# EAGLE board 4x4-soundboard (EAGLE 8.1.0)
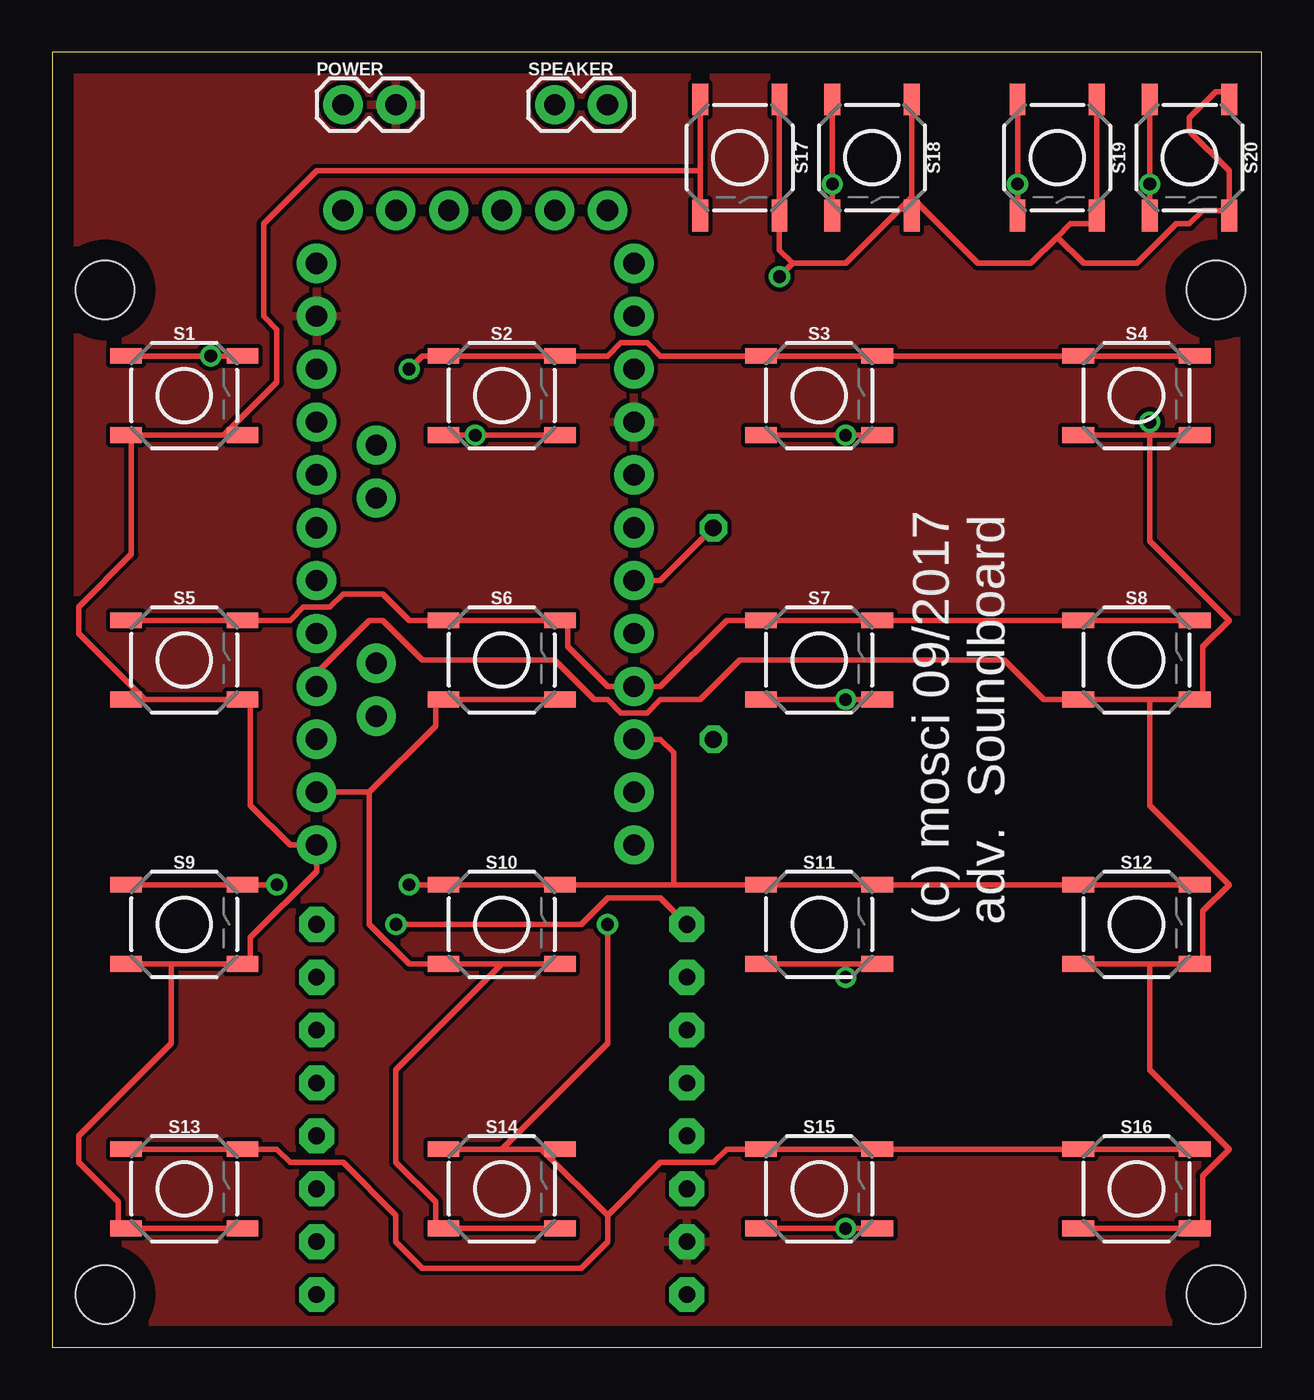
[diagram p0: board, top side]
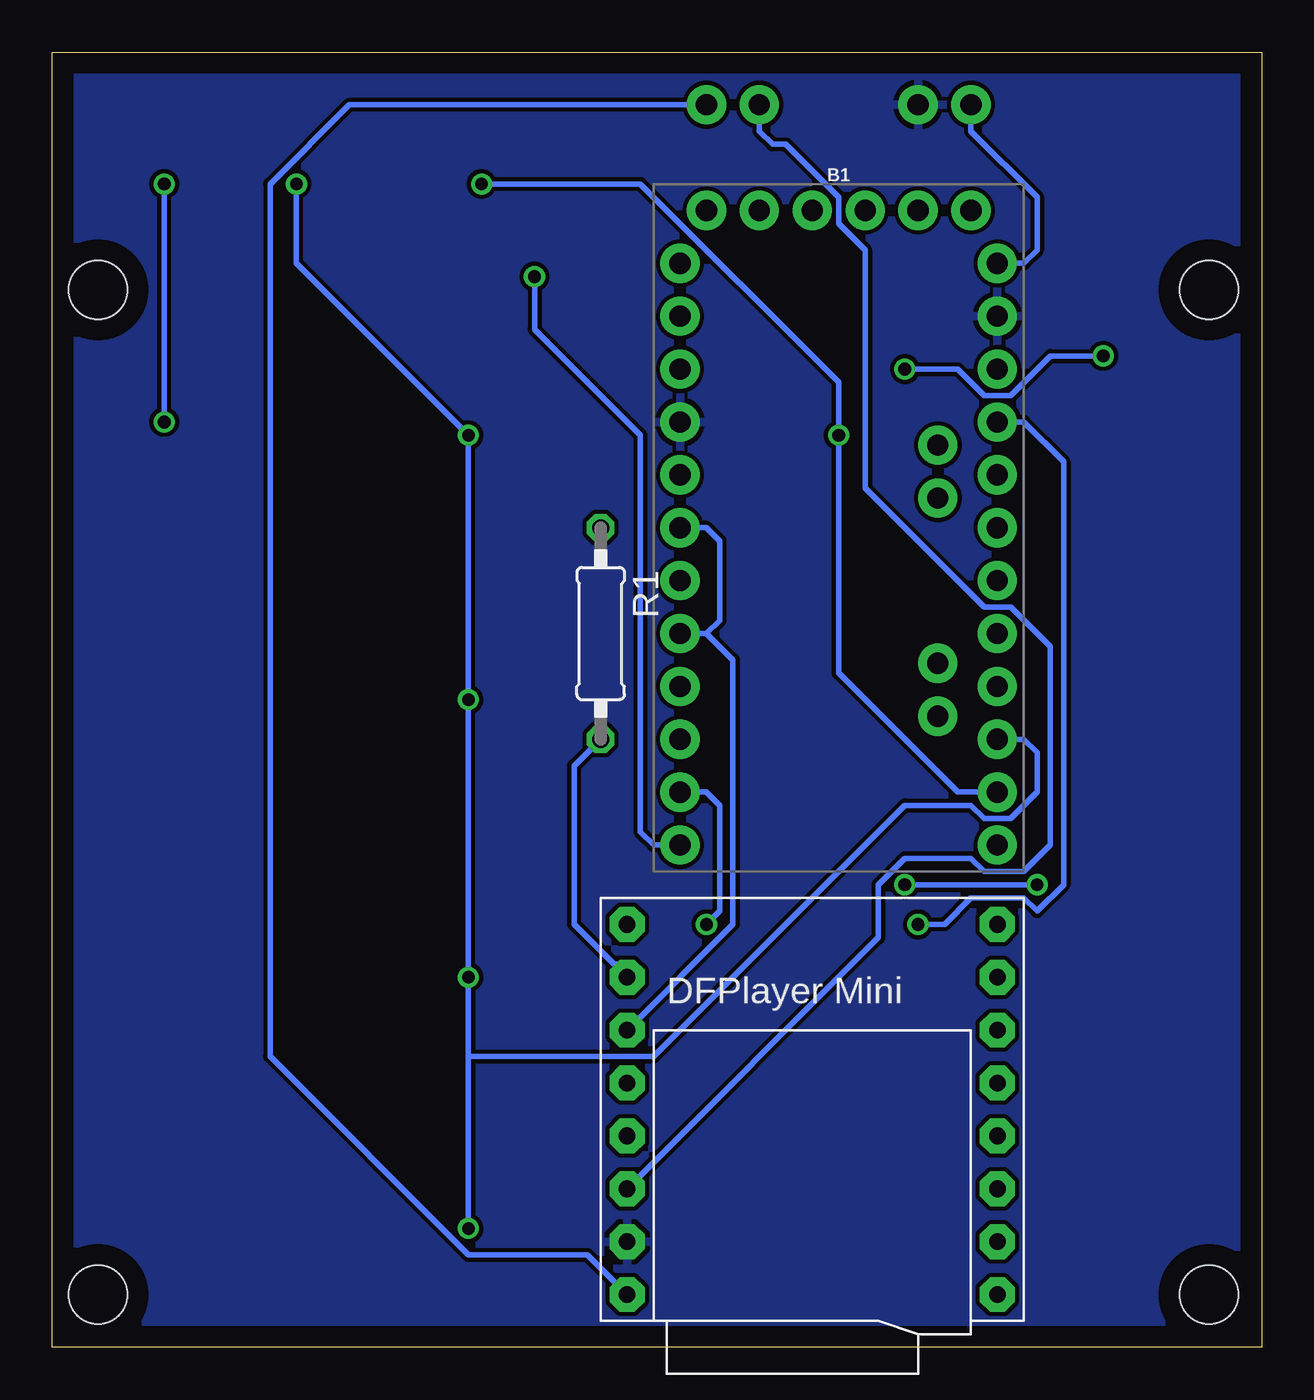
[diagram p1: board, bottom side, seen from below]

Size 58.09 x 62.22 mm. Coordinates in mm from the lower left corner, seen from the top.
Outline: 0,0 58.09,0 58.09,62.22 0,62.22 0,0
Copper layers (1*16): Top 0.035mm / dielectric 1.5mm / Bottom 0.035mm
Design rules "default": minimum track width 10mil, minimum drill 24mil, track to track 8mil, track to pad 8mil, pad to pad 8mil, via to via 8mil, smd to smd 8mil, copper to edge 40mil, drill to drill 8mil, minimum pad ring 10mil, minimum via ring 8mil, stop-mask expansion 4mil, vias tented up to drill 0mil, thermal gap 10mil
Holes 2.8 mm at 2.54,50.8 55.88,50.8 2.54,2.54 55.88,2.54

## Footprints (pad centres in the part's own frame; a part is rotated, then mirrored left to right if it is on the bottom)
ARDUINO_PRO_MINI = drill 1.016 pad 1.88: 1 -7.62,12.7; 2 -7.62,10.16; 3 -7.62,7.62; 4 -7.62,5.08; 5 -7.62,2.54; 6 -7.62,0; 7 -7.62,-2.54; 8 -7.62,-5.08; 9 -7.62,-7.62; 10 -7.62,-10.16; 11 -7.62,-12.7; 12 -7.62,-15.24; 13 7.62,-15.24; 14 7.62,-12.7; 15 7.62,-10.16; 16 7.62,-7.62; 17 7.62,-5.08; 18 7.62,-2.54; 19 7.62,0; 20 7.62,2.54; 21 7.62,5.08; 22 7.62,7.62; 23 7.62,10.16; 24 7.62,12.7; A4 4.763,1.429; A5 4.763,3.969; A6 4.763,-9.049; A7 4.763,-6.509; BLK -6.35,15.24; GND -3.81,15.24; GRN 6.35,15.24; RXI 1.27,15.24; TXO 3.81,15.24; VCC -1.27,15.24
1X02 = drill 1.016 pad 1.88: 1 0,0; 2 2.54,0
0207/10 = drill 0.813 octagon: 1 -5.08,0; 2 5.08,0
TACTILE_SWITCH_SMD_5.2MM = smd 1.524 x 0.762: 1 -2.794,1.905; 2 2.794,1.905; 3 -2.794,-1.905; 4 2.794,-1.905
DFPLAYER = drill 0.8 pad 1.676 octagon: ADKEY1 8.89,-1.27; ADKEY2 8.89,1.27; BUSY 8.89,8.89; DAC_L -8.89,-1.27; DAC_R -8.89,1.27; GND_1 -8.89,-6.35; GND_2 8.89,-6.35; IO1 8.89,-8.89; IO2 8.89,-3.81; RX -8.89,6.35; SPK1 -8.89,-3.81; SPK2 -8.89,-8.89; TX -8.89,3.81; USB+ 8.89,3.81; USB- 8.89,6.35; VCC -8.89,8.89

## Placement (x,y rotation side)
B1  ARDUINO_PRO_MINI  [ARDUINO_PRO_MINI]  20.32,39.37 0 bottom
POWER  [1X02]  13.97,59.69 0 top
R1  1K  [0207/10]  31.75,34.29 270 bottom
S1  [TACTILE_SWITCH_SMD_5.2MM]  6.35,45.72 0 top
S2  [TACTILE_SWITCH_SMD_5.2MM]  21.59,45.72 0 top
S3  [TACTILE_SWITCH_SMD_5.2MM]  36.83,45.72 0 top
S4  [TACTILE_SWITCH_SMD_5.2MM]  52.07,45.72 0 top
S5  [TACTILE_SWITCH_SMD_5.2MM]  6.35,33.02 0 top
S6  [TACTILE_SWITCH_SMD_5.2MM]  21.59,33.02 0 top
S7  [TACTILE_SWITCH_SMD_5.2MM]  36.83,33.02 0 top
S8  [TACTILE_SWITCH_SMD_5.2MM]  52.07,33.02 0 top
S9  [TACTILE_SWITCH_SMD_5.2MM]  6.35,20.32 0 top
S10  [TACTILE_SWITCH_SMD_5.2MM]  21.59,20.32 0 top
S11  [TACTILE_SWITCH_SMD_5.2MM]  36.83,20.32 0 top
S12  [TACTILE_SWITCH_SMD_5.2MM]  52.07,20.32 0 top
S13  [TACTILE_SWITCH_SMD_5.2MM]  6.35,7.62 0 top
S14  [TACTILE_SWITCH_SMD_5.2MM]  21.59,7.62 0 top
S15  [TACTILE_SWITCH_SMD_5.2MM]  36.83,7.62 0 top
S16  [TACTILE_SWITCH_SMD_5.2MM]  52.07,7.62 0 top
S17  [TACTILE_SWITCH_SMD_5.2MM]  33.02,57.15 270 top
S18  [TACTILE_SWITCH_SMD_5.2MM]  39.37,57.15 270 top
S19  [TACTILE_SWITCH_SMD_5.2MM]  48.26,57.15 270 top
S20  [TACTILE_SWITCH_SMD_5.2MM]  54.61,57.15 270 top
SPEAKER  [1X02]  24.13,59.69 0 top
U$1  DFPLAYER  [DFPLAYER]  21.59,11.43 0 bottom

## Library data of the parts
B1 = SparkFun-Boards
POWER SPEAKER = SparkFun-Connectors
R1 = resistor
S1-S20 = SparkFun-Switches; PROD_ID: SWCH-08247; SF_SKU: COM-08720
U$1 = DFPlayer_v1

## Nets
5V: B1.21 U$1.VCC
COL1: B1.13 S1.3 S1.4 S5.3 S5.4 S9.3 S9.4 S13.3 S13.4 S17.3 S17.4
COL2: B1.14 S2.3 S2.4 S6.3 S6.4 S10.3 S10.4 S14.3 S14.4 S18.3 S18.4
COL3: B1.15 S3.3 S3.4 S7.3 S7.4 S11.3 S11.4 S15.3 S15.4 S19.3 S19.4
COL4: B1.16 S4.3 S4.4 S8.3 S8.4 S12.3 S12.4 S16.3 S16.4 S20.3 S20.4
GND: B1.4 B1.23 POWER.2 U$1.GND_1
N$1: B1.7 R1.1
ROW1: S1.1 S1.2 S2.1 S2.2 S3.1 S3.2 S4.1 S4.2
ROW2: B1.9 S5.1 S5.2 S6.1 S6.2 S7.1 S7.2 S8.1 S8.2
ROW3: B1.10 S9.1 S9.2 S10.1 S10.2 S11.1 S11.2 S12.1 S12.2
ROW4: B1.11 S13.1 S13.2 S14.1 S14.2 S15.1 S15.2 S16.1 S16.2
ROW5: B1.12 S17.1 S17.2 S18.1 S18.2 S19.1 S19.2 S20.1 S20.2
SPK+: SPEAKER.1 U$1.SPK1
SPK-: SPEAKER.2 U$1.SPK2
SRX: B1.6 B1.8 U$1.TX
STX: R1.2 U$1.RX
VIN: B1.24 POWER.1

## Tracks (layer width: path | path; a pad name or v marks a point on that pad's centre or on a via)
5V  (via drill 0.61)
  Top 0.254: U$1.VCC 29.21,21.59 26.67,21.59 25.4,20.32 v16.51,20.32
  Bottom 0.254: v16.51,20.32 15.24,20.32 13.97,21.59 11.43,21.59 10.79,20.95 9.53,22.22 9.53,42.55 11.43,44.45 B1.21
COL1
  Top 0.254: S13.4 S13.3 3.17,5.71 3.17,6.98 1.27,8.89 1.27,10.16 5.71,14.61 5.71,18.41 | 5.71,18.41 S9.4 9.53,18.41 9.53,19.68 12.7,22.86 B1.13 11.43,24.13 9.53,26.04 9.53,31.11 S5.4 4.45,31.11 | 5.71,18.41 S9.3 | S17.3 31.11,56.52 | 31.11,56.52 S17.4 | S1.4 8.26,43.82 | 8.26,43.82 3.81,43.82 | 4.45,31.11 S5.3 | 3.81,43.82 3.81,38.1 1.27,35.56 1.27,34.29 4.45,31.11 | 3.81,43.82 S1.3 | 31.11,56.52 12.7,56.52 10.16,53.98 10.16,49.53 10.79,48.9 10.79,46.36 8.26,43.82
COL2  (via drill 0.61)
  Top 0.254: S14.4 S14.3 18.41,5.71 18.41,6.98 16.51,8.89 16.51,13.33 21.59,18.41 | S10.4 21.59,18.41 | 21.59,18.41 S10.3 17.14,18.41 15.24,20.32 15.24,26.67 | S18.3 v37.47,55.88 S18.4 | S2.4 v20.32,43.82 S2.3 | S6.4 S6.3 18.41,31.11 18.41,29.84 15.24,26.67 | B1.14 15.24,26.67
  Bottom 0.254: B1.14 14.61,26.67 20.32,32.38 v20.32,43.82 20.32,46.36 29.84,55.88 v37.47,55.88
COL3  (via drill 0.61)
  Top 0.254: S19.3 v46.35,55.88 S19.4 | S3.4 v38.1,43.82 S3.3 | S7.4 v38.1,31.11 S7.3 | S15.4 v38.1,5.71 S15.3 | S11.4 38.1,18.41 | 38.1,18.41 S11.3 | 38.1,18.41 v38.1,17.78
  Bottom 0.254: 38.1,13.97 v38.1,17.78 v38.1,31.11 v38.1,43.82 46.35,52.07 v46.35,55.88 | 38.1,13.97 v38.1,5.71 | B1.15 11.43,29.21 10.79,28.57 10.79,26.67 12.06,25.4 13.34,25.4 13.97,26.04 17.14,26.04 29.21,13.97 38.1,13.97
COL4  (via drill 0.61)
  Top 0.254: S16.3 S16.4 55.24,5.71 55.24,8.26 56.52,9.53 52.7,13.33 52.7,18.41 | 52.7,18.41 S12.4 55.24,18.41 55.24,20.95 56.52,22.22 52.7,26.04 52.7,31.11 | 52.7,18.41 S12.3 | S20.3 v52.7,55.88 S20.4 | 52.7,31.11 S8.4 55.24,31.11 55.24,33.66 56.52,34.93 52.7,38.74 52.7,43.82 | 52.7,31.11 S8.3 47.62,31.11 45.72,33.02 33.02,33.02 31.11,31.11 29.21,31.11 28.57,30.48 27.3,30.48 26.67,31.11 26.04,31.11 24.13,33.02 17.78,33.02 15.88,34.93 15.24,34.93 12.7,32.38 B1.16 | S4.4 52.7,43.82 | 52.7,43.82 S4.3 | 52.7,43.82 v52.7,44.45
  Bottom 0.254: v52.7,44.45 v52.7,55.88
GND
  pour Top: -7.62,90.17 66.04,90.17 66.04,-11.43 -7.62,-11.43
  pour Bottom: -3.81,85.09 62.23,85.09 62.23,-5.08 -3.81,-5.08
N$1
  Top 0.254: R1.1 29.21,36.83 B1.7
ROW1  (via drill 0.61)
  Top 0.254: S4.2 S4.1 S3.2 S3.1 29.21,47.62 28.57,48.26 27.3,48.26 26.67,47.62 S2.2 S2.1 17.78,47.62 v17.14,46.99 | S1.2 v7.62,47.62 S1.1
  Bottom 0.254: v7.62,47.62 10.16,47.62 12.06,45.72 13.34,45.72 14.61,46.99 v17.14,46.99
ROW2
  Top 0.254: S5.1 S5.2 11.43,34.93 12.06,35.56 13.34,35.56 13.97,36.2 15.88,36.2 17.14,34.93 S6.1 S6.2 24.77,34.93 24.77,33.66 26.67,31.75 B1.9 29.21,31.75 32.38,34.93 S7.1 S7.2 S8.1 S8.2
ROW3  (via drill 0.61)
  Top 0.254: S12.2 S12.1 S11.2 S11.1 29.84,22.22 | S9.1 S9.2 v10.79,22.22 | v17.14,22.22 S10.1 S10.2 29.84,22.22 | B1.10 29.21,29.21 29.84,28.57 29.84,22.22
  Bottom 0.254: v17.14,22.22 v10.79,22.22
ROW4  (via drill 0.61)
  Top 0.254: S16.2 S16.1 S15.2 S15.1 32.38,9.53 31.75,8.89 29.21,8.89 26.67,6.35 | S13.1 S13.2 10.79,9.53 11.43,8.89 13.97,8.89 16.51,6.35 16.51,5.08 17.78,3.81 25.4,3.81 26.67,5.08 26.67,6.35 | S14.2 23.5,9.53 | 23.5,9.53 21.59,9.53 | 21.59,9.53 S14.1 | 23.5,9.53 26.67,6.35 | v26.67,20.32 26.67,14.61 21.59,9.53
  Bottom 0.254: B1.11 26.67,26.67 26.04,26.04 26.04,20.95 v26.67,20.32
ROW5  (via drill 0.61)
  Top 0.254: 56.52,54.61 56.52,56.52 54.61,58.42 54.61,59.05 55.88,60.33 56.52,60.33 S20.1 | S19.1 S19.2 50.16,53.98 48.9,53.98 48.26,53.34 | S17.1 S17.2 34.92,52.71 35.56,52.07 | S18.1 41.27,55.25 | 41.27,55.25 S18.2 | 35.56,52.07 38.1,52.07 41.27,55.25 | 48.26,53.34 46.99,52.07 44.45,52.07 41.27,55.25 | 56.52,54.61 55.24,54.61 54.61,53.98 53.98,53.98 52.07,52.07 49.53,52.07 48.26,53.34 | 56.52,54.61 S20.2 | 35.56,52.07 v34.92,51.44
  Bottom 0.254: B1.12 29.21,24.13 29.84,24.77 29.84,43.82 34.92,48.9 v34.92,51.44
SPK+
  Bottom 0.254: U$1.SPK1 18.41,19.68 18.41,22.22 17.14,23.5 13.97,23.5 13.34,22.86 11.43,22.86 10.16,24.13 10.16,33.66 12.06,35.56 13.34,35.56 19.05,41.28 19.05,52.71 20.32,53.98 20.32,55.25 22.86,57.79 23.5,57.79 24.13,58.42 SPEAKER.1
SPK-
  Bottom 0.254: U$1.SPK2 32.38,4.45 38.1,4.45 47.62,13.97 47.62,55.88 43.81,59.69 SPEAKER.2
SRX
  Bottom 0.254: U$1.TX 25.4,20.32 25.4,33.02 26.67,34.29 | B1.8 26.67,34.29 | B1.6 26.67,39.37 26.04,38.74 26.04,34.93 26.67,34.29
STX
  Bottom 0.254: R1.2 33.02,27.94 33.02,20.32 31.11,18.41 30.48,18.41 U$1.RX
VIN
  Bottom 0.254: B1.24 11.43,52.07 10.79,52.71 10.79,55.25 13.97,58.42 POWER.1

## Text on the board
tNames: (c) mosci 09/2017 / adv. Soundboard